# Altium PCB PCB1.PcbDoc
Units mil, origin at the board's own origin, x right, y up, seen from the top; angles counter-clockwise.
Board outline 8640 x 2770 mil, 2 copper layers (Top Layer, Bottom Layer); 77 components, 64 nets, 281 pads, 38 vias.
Unrouted connection lines stored in the file: 4.
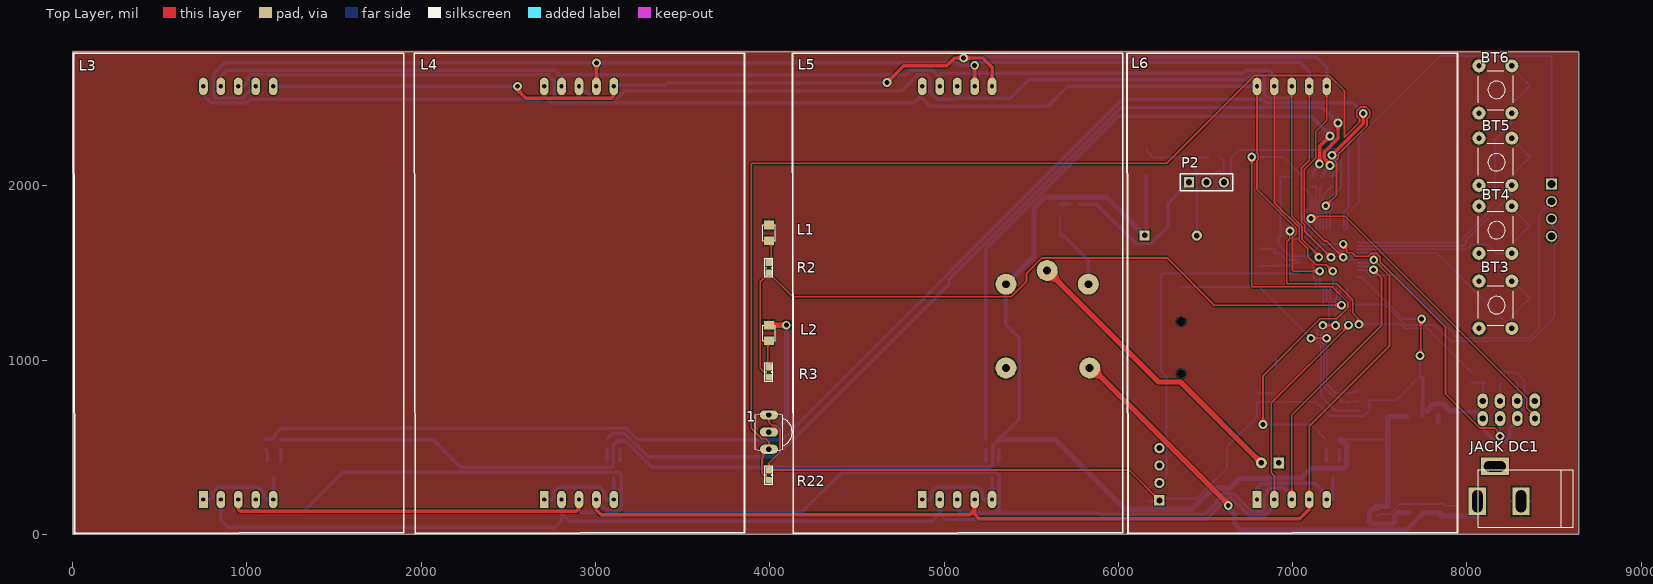
[diagram p0: Top Layer view]
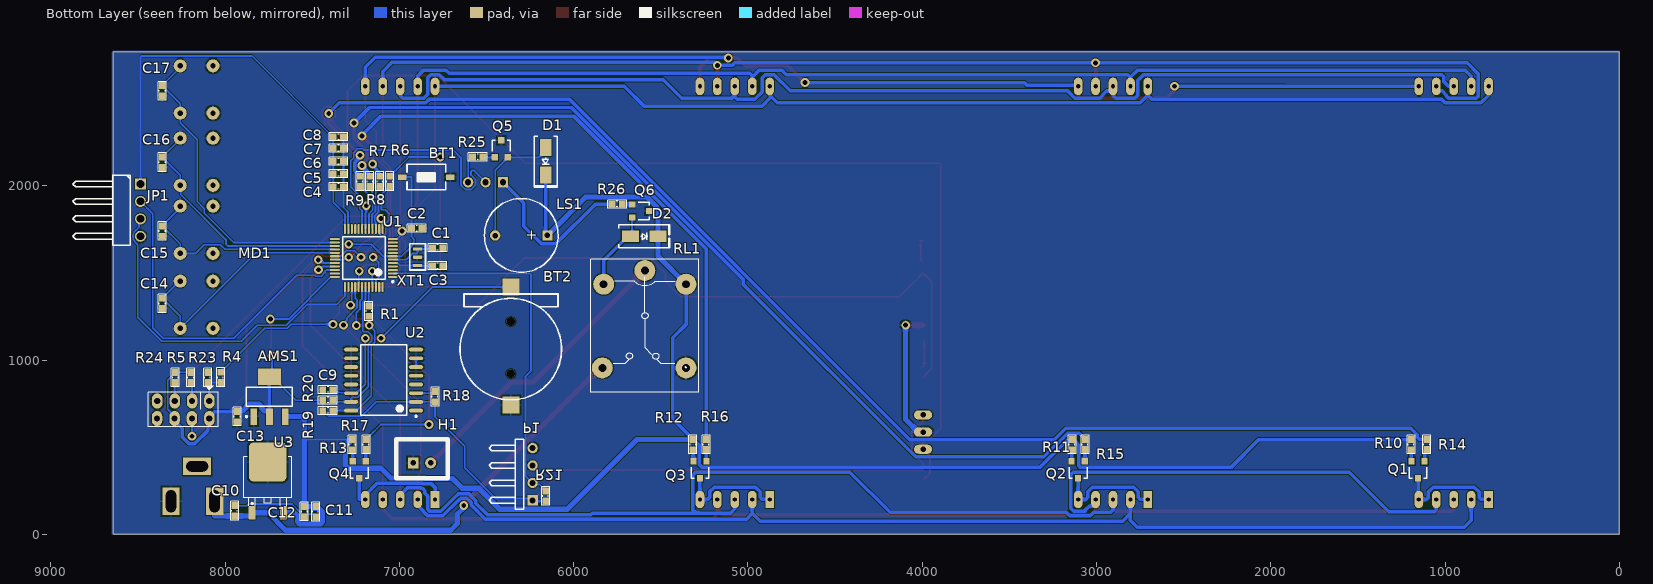
[diagram p1: Bottom Layer view, seen from below]
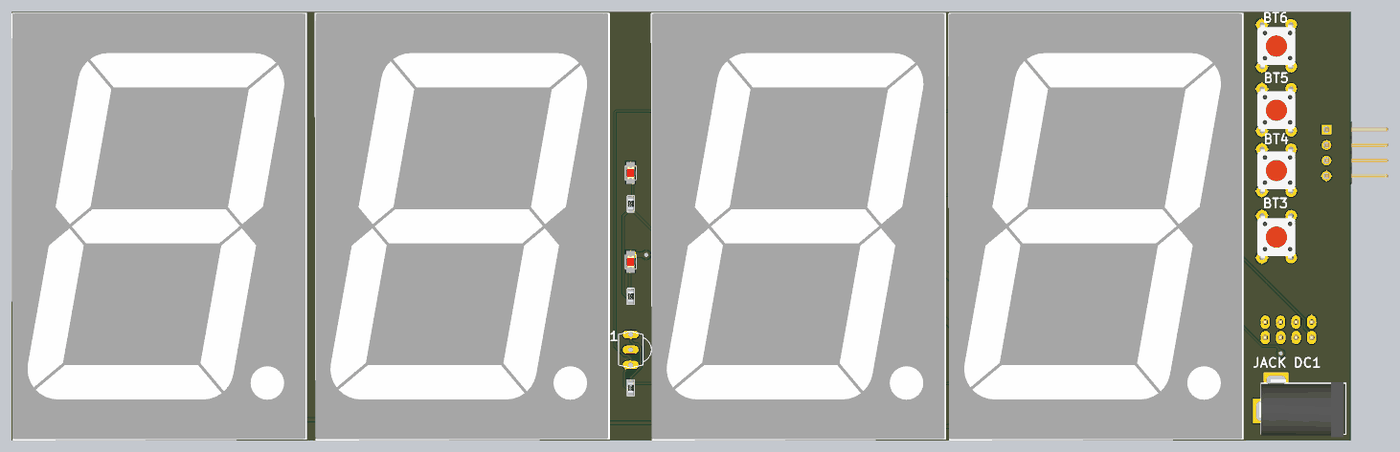
[diagram p2: 3D render of the assembled board from above, using the file's embedded part models]
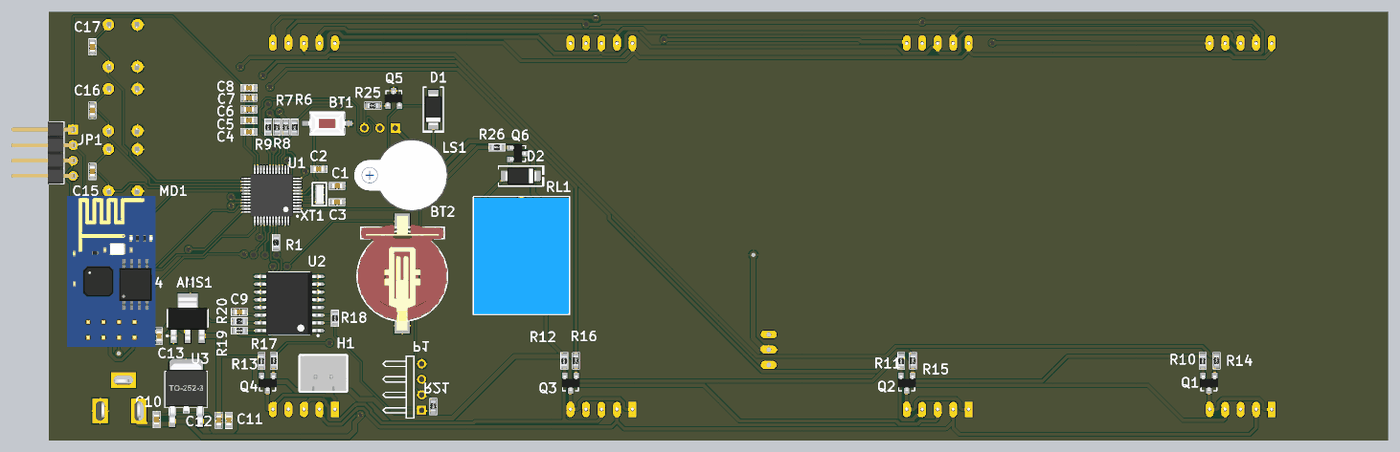
[diagram p3: 3D render of the assembled board from below, using the file's embedded part models]

## Layer stack, top to bottom
Top Solder: solder mask 0.4, Solder Resist, Dk 3.5
Top Layer: signal copper 1.4
Dielectric 1: dielectric 12.6, FR-4, Dk 4.8
Bottom Layer: signal copper 1.4
Bottom Solder: solder mask 0.4, Solder Resist, Dk 3.5

## Board outline
0,0 0,2770 8640,2770 8640,0

## Design rules (kind name [scope] priority, off if disabled: settings)
Clearance [All] p1: gap=6 ignorepadtopadclearanceinfootprint=FALSE
PolygonConnect [All] p1: connectstyle=Relief reliefconductorwidth=10 reliefentries=4 polygonreliefangle="90 Angle" airgapwidth=10
RoutingVias [All] p1: holewidth=28 width=50 viastyle="Through Hole" minholewidth=28 minwidth=50 maxholewidth=28 maxwidth=50
SolderMaskExpansion [All] p1: expansion=4 istentingtop=FALSE
Width [All] p1: maxlimit=30 minlimit=10 preferedwidth=20
30 further rules are at their usual default settings.

## Classes and differential pairs
component class TSOP1838: 1 R22
component class STM32F103xx_LQFP48: BT1 C1 C2 C3 C4 C5 C6 C7 C8 JP1 L1 L2 R1 R2 R3 R4 R5 R6 R7 R8 R9 U1 XT1
component class POWER_12_5_33: AMS1 C10 C11 C12 C13 "JACK DC1" U3
component class ESP8266_Module: MD1 R23 R24
component class DS3231: BT2 C9 R18 R19 R20 U2
component class DHT11: P1 R21
component class BUZZER_RELAY: D1 D2 H1 LS1 P2 Q5 Q6 R25 R26 RL1
component class BUTTONS: BT3 BT4 BT5 BT6 C14 C15 C16 C17
component class 4_LEDS_SEGMENT: L3 L4 L5 L6 Q1 Q2 Q3 Q4 R10 R11 R12 R13 R14 R15 R16 R17

## Components (designator, comment, footprint, x,y, rotation, side; value= is the part's Value field where it differs from the comment)
1 "TSOP1838" TSOP18XX 3993.95,586.62 r90 top
AMS1 "AMS1117-3.3V" SOT223 7745,790 r180 bottom value="AMS1117-3.3V SOT223"
BT1 "Nut Nhan 2 Chan SMD 3x6x2.5" "Nut Nhan 2 Chan SMD 3x6x2.5" 6845,2050 r0 bottom
BT2 "CR1220 SMD" "DE PIN CR1220" 6360,1080 r0 bottom
BT3 "Nut Nhan 4 Chan Cam 6x6" "Nut Nhan 4 Chan Cam 6x6" 8265,1440 r270 top
BT4 "Nut Nhan 4 Chan Cam 6x6" "Nut Nhan 4 Chan Cam 6x6" 8265,1870 r270 top
BT5 "Nut Nhan 4 Chan Cam 6x6" "Nut Nhan 4 Chan Cam 6x6" 8265,2260 r270 top
BT6 "Nut Nhan 4 Chan Cam 6x6" "Nut Nhan 4 Chan Cam 6x6" 8265,2675 r270 top
C1 "22pF" "tu 0603" 6780,1645 r180 bottom
C2 "104" "tu 0603" 6900,1755 r180 bottom
C3 "22pF" "tu 0603" 6780.47,1540 r180 bottom
C4 "104" "tu 0603" 7350,1995 r180 bottom
C5 "104" "tu 0603" 7350,2070 r180 bottom
C6 "104" "tu 0603" 7350,2140 r180 bottom
C7 "104" "tu 0603" 7350,2215 r180 bottom
C8 "104" "tu 0603" 7350,2280 r180 bottom
C9 "104" "tu 0603" 7410,830 r0 bottom
C10 "106" "tu 0603" 7945,135 r90 bottom
C11 "106" "tu 0603" 7480,130 r270 bottom
C12 "106" "tu 0603" 7545,130 r90 bottom
C13 "106" "tu 0603" 7930,675 r90 bottom
C14 "104" "tu 0603" 8360,1325 r270 bottom
C15 "104" "tu 0603" 8360,1740 r270 bottom
C16 "104" "tu 0603" 8360,2135 r270 bottom
C17 "104" "tu 0603" 8360,2545 r270 bottom
D1 "M7" "DIODE SMA" 6160,2140 r270 bottom
D2 "M7" "DIODE SMA" 5595,1710 r180 bottom
H1 "SPEAKER" XH2.54M-2 6920,410 r180 bottom
"JACK DC1" "JACK DC 5.5" "JACK DC 5.5" 8185,290 r180 top value="Jac DC"
JP1 "JP 1x4 2.54" "JP 1x4 DC" 8585,1660 r270 bottom
L1 "LED 0805" LED-0805-Red 3995,1685 r90 top
L2 "LED 0805" LED-0805-Red 3995,1110 r90 top
L3 "LED 7 Thanh" LED7SEG_2.3inch 910,1235 r0 top
L4 "LED 7 Thanh" LED7SEG_2.3inch 2865,1235 r0 top
L5 "LED 7 Thanh" LED7SEG_2.3inch 5035,1235 r0 top
L6 "LED 7 Thanh" LED7SEG_2.3inch 6955,1235 r0 top
LS1 "Coi Chip Speaker" "Coi Chip Speacker" 6150,1715 r0 bottom
MD1 "ESP8266 Module" "ESP2866 Module" 8090,765 r0 bottom
P1 "DHT11" HDR1X4H 6235,195 r90 bottom
P2 "BUZZER & RELAY SWITCHING" HDR1X3 6405,2020 r0 top
Q1 "HF" SOT23 1155,370 r0 bottom value=C9014
Q2 "HF" SOT23 3105,370 r0 bottom value=C9014
Q3 "HF" SOT23 5275,370 r0 bottom value=C9014
Q4 "HF" SOT23 7230,370 r0 bottom value=C9014
Q5 "HF" SOT23 6415,2211.91 r180 bottom value=C9014
Q6 "HF" SOT23 5615,1855 r270 bottom value=C9014
R1 "10k" "tro smd 0603" 7175,1280.47 r270 bottom
R2 "1k" "tro smd 0603" 3995,1529.53 r90 top
R3 "1k" "tro smd 0603" 3995,930.47 r90 top
R4 "1k" "tro smd 0603" 8025,900.47 r90 bottom
R5 "2k" "tro smd 0603" 8100,900 r270 bottom
R6 "1k" "tro smd 0603" 7055,2025 r90 bottom
R7 "1k" "tro smd 0603" 7111.67,2025 r90 bottom
R8 "1k" "tro smd 0603" 7168.33,2025 r90 bottom
R9 "1k" "tro smd 0603" 7225,2025 r90 bottom
R10 "330R" "tro smd 0603" 1195,514.53 r90 bottom
R11 "330R" "tro smd 0603" 3140,514.53 r90 bottom
R12 "330R" "tro smd 0603" 5315,514.53 r90 bottom
R13 "330R" "tro smd 0603" 7270,514.53 r90 bottom
R14 "100R" "tro smd 0603" 1105,515.53 r270 bottom
R15 "100R" "tro smd 0603" 3065,515.53 r270 bottom
R16 "100R" "tro smd 0603" 5240,515.53 r270 bottom
R17 "100R" "tro smd 0603" 7190,515.53 r270 bottom
R18 "10k" "tro smd 0603" 6795,790 r270 bottom
R19 "10k" "tro smd 0603" 7410,710 r0 bottom
R20 "10k" "tro smd 0603" 7410,770 r0 bottom
R21 "4.7k" "tro smd 0603" 6160,220 r270 bottom
R22 "4.7k" "tro smd 0603" 3995,340 r90 top
R23 "10k" "tro smd 0603" 8196.67,900 r270 bottom
R24 "10k" "tro smd 0603" 8285,900 r270 bottom
R25 "100R" "tro smd 0603" 6550,2165 r180 bottom
R26 "100R" "tro smd 0603" 5750,1895 r180 bottom
RL1 "Relay" "Relay 5 Chan SRD" 5591.22,1514.06 r270 bottom
U1 "STM32F103xx_LQFP48" STM32_LQPF48 7203.66,1585.79 r0 bottom
U2 "DS3231" "SOIC 16" 7090,885 r0 bottom
U3 "78M05 SMD TO252" TO252 7755,269.33 r180 bottom
XT1 "20Mhz" "Thach Anh 3 Chan SMD" 6895,1637.24 r270 bottom value=4Mhz

## Footprints (in the part's own frame and the unit in brackets; to place one, negate y for a bottom-side part, rotate by r counter-clockwise, add the part's x,y. Pads: shape width x height; smd on the part's side, far side on the other; paste and mask are expansions set on the pad)
"Coi Chip Speacker" [mm]
  rect 1.5x1.5 hole 0.8: 1(0,0)
  round 1.5 hole 0.8: 2(7.62,0.013)
  silkscreen extent -1.55,-5.38 9.18,5.36, body extent -2.22,-6 13.24,6, height 4.5
"DE PIN CR1220" [mm]
  rect 2.5x2.5 smd: 1(0,-8.6) 2(0,8.6)
  silkscreen extent -7.39,-7.6 7.4,7.84, body extent -7.39,-9.42 7.36,9.38, height 4.27
"DIODE SMA" [mm] "SMA"
  rect 2.5x1.7 smd: 1(-2,0) 2(2,0)
  silkscreen extent -3.68,-1.65 3.75,1.65, body extent -2.6,-1.37 2.6,1.37, height 2.4
"ESP2866 Module" [mil]
  oval 60x86 hole 36: 1(0,0) 2(99,0) 3(198,0) 4(299,0) 5(0,100) 6(100,100) 7(199.5,100) 8(300,100)
  silkscreen extent -51,-86 350,149, body extent -137,-817 433,159, height 381
HDR1X3 [mm] "Connector; Header; 3 Position"
  rect 1.5x1.5 hole 0.9: 1(0,0)
  round 1.5 hole 0.9: 2(2.54,0) 3(5.08,0)
  silkscreen extent -1.27,-1.27 6.35,1.27
HDR1X4H [mm] "Connector; Header; 4 Position; Right Angle"
  rect 1.5x1.5 hole 0.9: 1(0,0)
  round 1.5 hole 0.9: 2(2.54,0) 3(5.08,0) 4(7.62,0)
  silkscreen extent -1.27,1.27 8.89,6.35
"JACK DC 5.5" [mil] "Jac DC input"
  rect 100x160 hole 59.06 slot 125.98 at 90 deg: 1(125,100) 2(-125,100)
  rect 160x100 hole 59.06 slot 125.98 at 0 deg: 3(25,-100)
  silkscreen extent -425,-80 120,250, body extent -410,-105 134,269, height 434
"JP 1x4 DC" [mm] "4 pins, 1 row, right angled, gold plating"
  rect 1.6x1.6 hole 1.1: 1(-8.89,2.54)
  round 1.6 hole 1.1: 2(-6.35,2.54) 3(-3.81,2.54) 4(-1.27,2.54)
  silkscreen extent -10.16,-7.34 0,1.04, body extent -10.16,-7.57 0,2.79, height 2.54
LED7SEG_2.3inch [mil] "Dán"
  rect 50x100 hole 25: 1(-160,-1035)
  oval 50x100 hole 25: 2(-60,-1035) 3(40,-1035) 4(140,-1035) 5(240,-1035) 6(240,1335.08) 7(140,1335.08) 8(40,1335.08) 9(-60,1335.08) 10(-160,1335.08)
  silkscreen extent -905,-1230 990,1525, body extent -905,-1228 985,1528, height 480
LED-0805-Red [mil]
  rect 50x55 smd: 1(0,0) 2(90,0)
  silkscreen extent 0,-35 90,35, body extent 5,-25 85,25, height 43
"Nut Nhan 2 Chan SMD 3x6x2.5" [mm] "Switch SMD type"
  rect 1.2x0.8 smd: 1(-3.5,0) 2(3.5,0)
  silkscreen extent -2.82,-1.85 2.82,1.85, body extent -3.05,-1.85 3.05,1.85, height 2.5
"Nut Nhan 4 Chan Cam 6x6" [mil] "SW button 4pin, 250 x250 mil"
  round 75 hole 31: 1(-13,-8) 1(258,-8) 2(-13,-196) 2(258,-196)
  silkscreen extent 15,-215 240,0, body extent -31,-225 281,19, height 276
"Relay 5 Chan SRD" [mil] "Relay SPDT, 5 pin, 10A,W 650mil, L 800mil, H 800mil"
  round 120 hole 45: 1(0,0) 2(559.06,236.22) 3(559.06,-243.78) 4(78.74,-236.22) 5(78.74,236.22)
  silkscreen extent -63,-311 700,310, body extent -55,-306 697,304, height 602
"SOIC 16" [mm] "SOIC, 16-Leads, Body 10.30x7.50mm, Pitch 1.27mm, IPC Medium Density"
  oval 2.032x0.55 smd: 1(-4.725,4.445) 2(-4.725,3.175) 3(-4.725,1.905) 4(-4.725,0.635) 5(-4.725,-0.635) 6(-4.725,-1.905) 7(-4.725,-3.175) 8(-4.725,-4.445) 9(4.725,-4.445) 10(4.725,-3.175) 11(4.725,-1.905) 12(4.725,-0.635) 13(4.725,0.635) 14(4.725,1.905) 15(4.725,3.175) 16(4.725,4.445)
  silkscreen extent -4.85,-5.15 3.35,5.39, body extent -5.15,-5.17 5.16,5.16, height 2.48
SOT23 [mm] "SOT23"
  rect 0.9x0.95 smd: 1(-0.95,-1.25) 2(0,1.25)
  rect 0.9x0.95 smd mask+0: 3(0.95,-1.25)
  silkscreen extent -1.3,-0.38 1.3,1.25, body extent -1.52,-1.23 1.48,1.27, height 1.06
SOT223 [mm]
  rect 1x2.4 smd: 1(-2.3,-2.9) 2(0,-2.9) 3(2.3,-2.9)
  rect 3.3x2.4 smd: 4(0,2.9)
  silkscreen extent -3.48,-3.02 3.35,1.4, body extent -3.25,-3.56 3.25,3.4, height 1.68
STM32_LQPF48 [mm]
  oval 1.45x0.3 smd: 1(-4.225,2.75) 2(-4.225,2.25) 3(-4.225,1.75) 4(-4.225,1.25) 5(-4.225,0.75) 6(-4.225,0.25) 7(-4.225,-0.25) 8(-4.225,-0.75) 9(-4.225,-1.25) 10(-4.225,-1.75) 11(-4.225,-2.25) 12(-4.225,-2.75) 25(4.225,-2.75) 26(4.225,-2.25) 27(4.225,-1.75) 28(4.225,-1.25) 29(4.225,-0.75) 30(4.225,-0.25) 31(4.225,0.25) 32(4.225,0.75) 33(4.225,1.25) 34(4.225,1.75) 35(4.225,2.25) 36(4.225,2.75)
  oval 0.3x1.45 smd: 13(-2.75,-4.225) 14(-2.25,-4.225) 15(-1.75,-4.225) 16(-1.25,-4.225) 17(-0.75,-4.225) 18(-0.25,-4.225) 19(0.25,-4.225) 20(0.75,-4.225) 21(1.25,-4.225) 22(1.75,-4.225) 23(2.25,-4.225) 24(2.75,-4.225) 37(2.75,4.225) 38(2.25,4.225) 39(1.75,4.225) 40(1.25,4.225) 41(0.75,4.225) 42(0.25,4.225) 43(-0.25,4.225) 44(-0.75,4.225) 45(-1.25,4.225) 46(-1.75,4.225) 47(-2.25,4.225) 48(-2.75,4.225)
  silkscreen extent -4.35,-3.1 3.1,3.57, body extent -4.5,-4.5 4.5,4.5, height 1.6
"Thach Anh 3 Chan SMD" [mm] "SMD Crystal CMR309T package"
  rrect25% 0.45x1.35 smd: 1(0,0) 2(1.2,0) 3(2.4,0)
  silkscreen extent -0.76,-1.14 3.05,1.14, body extent -0.41,-0.63 2.79,0.67, height 1.02
TO252 [mm] "TO252"
  round 0.5 on Mech15: 0(0,0)
  rrect25% 1x2 smd: 1(-2.285,-3.7) 3(2.285,-3.7)
  rrect25% 5.5x5.7 smd: 2(0,3.7)
  silkscreen extent -3.5,-2.7 3.5,4.5, body extent -3.3,-3.95 3.3,5.76, height 2.31
"tro smd 0603" [mm] "Chip Capacitor, 2-Leads, Body 1,60x0,80mm, IPC Medium Density"
  rect 1x0.95 smd mask+0.076: 1(-0.75,0) 2(0.75,0)
  silkscreen extent -1.35,-0.58 1.37,0.58, body extent -0.82,-0.42 0.82,0.43, height 0.44
TSOP18XX [mil]
  oval 52x104 hole 32: GND(-0.05,-1.05) OUT(-98.47,-1.05) VCC(98.38,-1.05)
  silkscreen extent -118,-134 118,78
"tu 0603" [mm] "Chip Capacitor, 2-Leads, Body 1,60x0,80mm, IPC Medium Density"
  rect 1x0.95 smd mask+0.076: 1(-0.75,0) 2(0.75,0)
  silkscreen extent -1.35,-0.58 1.37,0.58, body extent -0.8,-0.4 0.8,0.4, height 0.9
XH2.54M-2 [mm]
  rect 1.6x1.6 hole 0.8: 1(0,0)
  round 1.6 hole 0.8: 2(2.54,0)
  silkscreen extent -2.48,-2.26 5.02,3.46, body extent -2.48,-2.26 5.02,3.48, height 6.91

## Part data
1: "IR Remote Receiver 38KHz 35m 3-Pin", Package=None, Availability=Unavailable, MF=Vishay, MP=TSOP1838, Price=None, SnapEDA_Link=https://www.snapeda.com/parts/TSOP1838/Vishay/view-part/561684/?ref=snap
AMS1: library part "AMS1117 SMD", "Dán", Chung_Loai=Dán, Don_Vi=Con, Ma_Hang=MH000596
BT2: library part "De pin CR1220 SMD", Ma_Hang=MH000833, Ten="Đế PIN CR1220 SMD"
BT3 BT4 BT5 BT6: "Nut Nhan 4 Chan 6x6mm", Ma_Hang=MH004584, Ten="Nút Nhấn 4 Chân 6x6x5MM DIP"
C1 C3: library part "Tu 0603 22pF 50V 10%", "Dán", Chung_Loai=Dán, Don_Vi=Con, Ma_Hang=MH004570, So_Chan=2, Ten_Linh_Kien="Tụ 0603 22pF 50V 10%"
C2 C4 C5 C6 C7 C8 C9 C14 C15 C16 C17: library part "Tu 0603 104 50V 10%", "Dán", Chung_Loai=Dán, Don_Vi=Con, Ma_Hang=MH004568, So_Chan=2, Ten_Linh_Kien="Tụ 0603 104-100nF 10% 50V"
C10 C11 C12 C13: library part "Tu 0603 106 16V 20%", "Dán", Chung_Loai=Dán, Don_Vi=Con, Ma_Hang=MH004848, So_Chan=2, Ten_Linh_Kien="Tụ 0603-10uF 20% 16V"
D1 D2: library part "Diode M7 ( 4007 )", "Dán", Chung_Loai=Dán, Don_Vi=Con, Ma_Hang=MH000944, Ten_Linh_Kien="Diode M7 1N4007 SMD 1A 1000V"
H1: library part "Header 2P 2.54 Duc Thang", "Cắm", Chung_Loai=Cắm, Don_Vi=Con, Ma_Hang=MH001283, Ten_Linh_Kien="Header 2P XH2.54-2P Đực Thẳng"
JP1: library part "JP 1x4 2.54 Duc Cong", "Cắm", Chung_Loai=Cắm, Don_Vi=Con, Ma_Hang=MH000904, Ten_Linh_Kien="Jump Đơn Đực 2.54MM 1x40P Cong Đứng"
L1 L2: library part "LED 0805 Do", "Dán", Chung_Loai=Dán, Don_Vi=Con, Ma_Hang=MH000897, Ten_Linh_Kien="LED 0805 Màu Đỏ (Red)"
L3 L4 L5 L6: library part "LED 7x1 2.3inch Anot", "Dán", Chung_Loai=Dán, Don_Vi=Con, Ma_Hang=MH000901, Ten_Linh_Kien="Led 7 2.3 1 Số Anot (Sáng Đỏ)"
LS1: "Còi chip"
P1: library part "Header 4H", "Header, 4-Pin, Right Angle", LatestRevisionDate=17-Jul-2002, LatestRevisionNote="Re-released for DXP Platform.", Publisher="Altium Limited"
P2: library part "Header 3", "Header, 3-Pin", LatestRevisionDate=17-Jul-2002, LatestRevisionNote="Re-released for DXP Platform.", Publisher="Altium Limited"
Q1 Q2 Q3 Q4 Q5 Q6: library part "C1815 HF SMD", "NPN transistor"
R1 R18 R19 R20 R23 R24: library part "Tro 0603 1% 10k", "Dán", Chung_Loai=Dán, Don_Vi=Con, Ma_Hang=MH006333, So_Chan=2, Ten_Linh_Kien="Trở 0603 1% 10k"
R2 R3 R4 R6 R7 R8 R9: library part "Tro 0603 1% 1k", "Dán", Chung_Loai=Dán, Don_Vi=Con, Ma_Hang=MH006334, So_Chan=2, Ten_Linh_Kien="Trở 0603 1% 1k"
R5: library part "Tro 0603 5% 2k", "Dán", Chung_Loai=Dán, Don_Vi=Con, Ma_Hang=MH006324, So_Chan=2, Ten_Linh_Kien="Trở 0603 5% 2k"
R10 R11 R12 R13: library part "Tro 0603 5% 330R", "Dán", Chung_Loai=Dán, Don_Vi=Con, Ma_Hang=MH006910, So_Chan=2, Ten_Linh_Kien="Trở 0603 5% 330R"
R14 R15 R16 R17 R25 R26: library part "Tro 0603 5% 100R", "Dán", Chung_Loai=Dán, Don_Vi=Con, Ma_Hang=MH006315, So_Chan=2, Ten_Linh_Kien="Trở 0603 5% 100R"
R21 R22: library part "Tro 0603 5% 4.7k", "Dán", Chung_Loai=Dán, Don_Vi=Con, Ma_Hang=MH006327, So_Chan=2, Ten_Linh_Kien="Trở 0603 5% 4.7k"
RL1: library part "Relay 5 Chan SRD", "Relay 5 Chan", Ma_Hang=MH009374, Ten="Relay 5V10A SRD-05VDC-SL-C Chính Hãng"
U2: library part "DS3231 SMD", "SOIC"
U3: "Dán", Chung_Loai=Dán, Don_Vi=Con, Ma_Hang=MH001917, Ten_Linh_Kien="78M05 TO252"
XT1: library part "Thach anh 3 Chan SMD", "Crystal For all Crystal 2pin."
BT1: Ma_Hang=MH001036, Ten="Nút Nhấn 2 Chân 3x6x2.5MM SMD"
U1: ComponentLink1Description="Manufacturer Link", ComponentLink1URL=www.st.com/stm32, ComponentLink2Description=Datasheet, ComponentLink2URL=http://www.st.com/stonline/products/literature/ds/13587.pdf, DatasheetVersion="rev6, Mar-2008", PackageDescription="48-Pin Low-Profile Quad Flat Pack, 7 x 7 mm Body, 0.5 mm Pitch (LQFP48)", PackageReference=LQFP48, PackageVersion=Mar-2008, Published=30-May-2008, Publisher="Altium Limited"

## Via types
v1: diameter 50, hole 28, Top Layer to Bottom Layer, tented both sides, 36 vias
v2: diameter 50, hole 50, Top Layer to Bottom Layer, tented both sides, 2 vias

## Nets (pads, with @x,y where several pads share a name; then routed paths per layer and width w, separated by ;. In a path a pad name is that pad's centre, name@x,y a point inside that pad or via, vN(x,y) a via of type N, cw(c..) or ccw(c..) an arc to the next point about the centre after c; other vN are vias at no path point)
+3.3: 1.VCC AMS1.2 AMS1.4 C4.1 C5.1 C6.1 C7.1 C8.1 C13.2 JP1.1 MD1.5 MD1.7 P1.1 R18.2 R19.2 R20.2 R21.2 R22.2 R23.1 R24.1 U1.9 U1.24 U1.36 U1.48 U2.2 | length 9611.2
  Top Layer w10: 1.VCC 3995,644 4014.43,624.57 4036.74,624.57 4059,602.31 4059,472.41 3995,408.41 R22.2 6060.47,369.53 P1.1 ; v1(7730,1025) 7735,1030 7735,1230 v1(7740,1235)
  Bottom Layer w10: R21.2 6230.47,190.47 6246,206 6449.23,206 6625,381.77 6625,505 6795,675 R18.2 6903.98,760.47 U2.2 7131.48,760 7212.18,679.3 7407.84,679.3 7438.54,710 R19.2 R20.2 7593.11,770 7727.28,904.17 AMS1.4@7736.14,904.17 ; U1.24 7311.93,1836.93 7379.53,1904.53 C4.1 C5.1 C6.1 C7.1 C8.1 7380.51,2280 7845.51,2745 8479.14,2745 8485,2739.14 JP1.1 ; U1.36 7370.59,1476.93 7393.23,1476.93 7635.16,1235 v1(7740,1235) ; v1(7730,1025) 7730,910.32 AMS1.4@7736.14,904.17 ; AMS1.4 AMS1.4@7736.14,904.17 ; R23.1 R24.1 8285,928.54 8329,884.54 8329,717.5 8289.5,678 MD1.7
  Bottom Layer w20: AMS1.2 7745,703.39 AMS1.4 ; C13.2 8058.28,704.53 8090,672.81 MD1.5 8097.65,657.35 8097.65,595.95 8172.6,521 8207.4,521 8244.62,558.22 8244.62,607.12 8289.5,652 MD1.7
  Bottom Layer w30: AMS1.2@7745,703.39 7749.69,708.07 7773.29,708.07 7790.87,725.64 7790.87,733.43 7805.51,748.07 7865.59,748.07 7880.24,733.43 7880.24,726.79 7897.81,709.21 7926.3,709.21 7930,705.51 C13.2
+5: AMS1.3 C11.1 C12.2 D1.2 D2.2 LS1.1 R10.2 R11.2 R12.2 R13.2 RL1.5 U3.3 | length 10891.3
  Bottom Layer w10: R13.2 7545,544.06 7545,545
  Bottom Layer w20: R10.2 2067.76,544.06 2228.3,383.51 3092.36,383.51 3102.31,393.47 3102.31,509.74 3126.94,534.37 R11.2@3131.3,534.37 ; R11.2 3140,543.07 3148.7,534.37 3173.93,534.37 3324.79,383.51 5262.36,383.51 5277.69,398.84 5277.69,510.11 5301.94,534.37 5306.3,534.37 5315,543.07 R12.2 5315,545.04 5432,662.04 5432,1127.18 5355,1204.18 RL1.5 ; LS1.1@6160,1725 D1.2
  Bottom Layer w30: R12.2@5315,543.07 5315.98,544.06 5635.94,544.06 6035.53,144.47 6424.47,144.47 6545,265 6640,265 6695,320 6851.41,320 6854.41,323 7048.94,323 7105.46,379.51 7293.82,379.51 7309.7,395.39 7309.7,513.38 7297.4,525.69 7287.39,525.69 7270,543.07 R13.2 ; RL1.5 5516.26,1596.58 D2.2 5516.26,1865.17 5526.09,1875 5526.09,1881.41 5579.67,1935 5930,1935 LS1.1 LS1.1@6160,1725 ; C11.1 7501.15,159.53 C12.2 7545,544.06 ; 7501.15,158.39 7490.65,147.89 7459.34,147.89 7440.3,128.86 7440.3,72.09 7452.6,59.79 7572.4,59.79 7584.7,72.09 7584.7,106.09 7602.27,123.66 U3.3 ; 7545,545 7545,675.83 AMS1.3
+12: "JACK DC1.1" C10.1 RL1.3 U3.1 | length 2802.6
  Top Layer w30: RL1.3 5847.87,955 6626.17,176.7 6626.17,168.83 v1(6630,165)
  Bottom Layer w30: v1(6630,165) 6624.74,159.74 6624.74,157.19 6667.17,114.77 6667.17,61.57 6704.95,23.79 7652.45,23.79 7752.33,123.66 U3.1 7844.96,105.47 C10.1 8060,105.47 8060,190
BOOT0: R1.1 U1.44 | length 110.3
  Bottom Layer w10: U1.44 7175,1419.45 R1.1
BUZZER: P2.3 R25.1 | length 156.1
  Bottom Layer w10: R25.1 6580.51,2165 6605,2140.51 P2.3
GND: 1.GND "JACK DC1.2" AMS1.1 BT1.1 BT2.2 BT3.2 BT4.2 BT5.2 BT6.2 C1.2 C2.2 C3.2 C4.2 C5.2 C6.2 C7.2 C8.2 C9.2 C10.2 C11.2 C12.1 C13.1 C14.2 C15.2 C16.2 C17.2 H1.1 JP1.4 L1.2 L2.2 MD1.4 P1.4 Q5.2 Q6.2 R1.2 R5.1 RL1.2 U1.8 U1.23 U1.35 U1.47 U2.5 U2.6 U2.7 U2.8 U2.9 U2.10 U2.11 U2.12 U2.13 U3.2 XT1.2 | length 1893.8
  Top Layer w30: L2.2 v1(4095,1200)
  Bottom Layer w10: U2.6 U2.7 ; U1.23 7292.24,1775.25 7294.02,1777.03 7294.02,1849.02 7320,1875 7320,1994.53 C4.2 C5.2 C6.2 C7.2 C8.2 ; C11.2 7480,101.46 7493.7,115.16 7557,115.16 7615.88,174.03 7866.32,174.03 7875.82,164.53 C10.2
  Bottom Layer w30: 1.GND 4021,586.57 4095,660.57 v1(4095,1200) ; AMS1.1@7830.87,643.58 7835.55,648.27 AMS1.1
LED_7_Thanh_A: L3.7 L4.7 L5.7 L6.7 U1.30 | length 8357.3
  Top Layer w10: L6.7 7095,2146.22 7050.09,2101.32 7050.09,1793.7 7069,1774.79 7069,1738.33 7217.33,1590 v1(7220,1590)
  Top Layer w20: L4.7 v1(3005,2705) ; L5.7 v1(5175,2691)
  Bottom Layer w10: v1(7220,1590) 7257,1627 7305.33,1627 7336.35,1595.98 7369.65,1595.98 U1.30
  Bottom Layer w20: L3.7 1050,2545 1017,2545 992,2520 992,2515.08 980,2503.08 820,2503.08 808,2515.08 808,2640 873,2705 v1(3005,2705) 5074.5,2705 5088.5,2691 v1(5175,2691) 5194,2710 7040,2710 7095,2655 L6.7
LED_7_Thanh_B: L3.6 L4.6 L5.6 L6.6 U1.31 | length 7860.2
  Top Layer w10: L6.6 7195,2374.39 7132,2311.39 7132,2159.18 7066.09,2093.27 7066.09,1800.33 7183.93,1682.49 7195.18,1682.49 7287.67,1590 v1(7290,1590)
  Top Layer w20: v1(2552,2571) 2552,2551 2600,2503 3090,2503 3105,2518 L4.6 ; v1(4672,2592) 4768,2688 5015,2688 5060,2733 v1(5112,2733) 5222,2733 5275,2680 L5.6
  Bottom Layer w10: v1(7290,1590) 7300.82,1590 7314.88,1575.94 U1.31
  Bottom Layer w20: L3.6 1150,2570 1915,2570 1916,2571 v1(2552,2571) ; L4.6 3105,2578 3399,2578 3413,2592 v1(4672,2592) ; v1@5116,2737 7138,2737 7195,2680 L6.6
LED_7_Thanh_C: L3.4 L4.4 L5.4 L6.4 U1.32 | length 8708.4
  Top Layer w10: L6.4 7095,619.24 7555,1079.24 7555,1485 v1(7465,1575)
  Top Layer w20: L4.4 3005,140 3032,113 5148,113 5175,140 ; L5.4 5175,140 ; L6.4 7095,145 7040,90 5200,90 5175,115 5175,140
  Bottom Layer w10: U1.32 7435.44,1556.26 7454.18,1575 v1(7465,1575)
  Bottom Layer w20: L3.4 1050,140 1060,130 1323,130 1549.51,356.51 3133.49,356.51 3147,343 3147,150 3130,133 3063,133 3063,140 3042,161 3005,161 L4.4
LED_7_Thanh_D: L3.3 L4.3 L5.3 L6.3 U1.33 | length 8788.8
  Top Layer w10: L6.3 6995,685 7510,1200 7510,1468.28 7463.84,1514.45 v1(7463.84,1518.01)
  Top Layer w20: L3.3 950,143 960,133 2890,133 2905,148 L4.3
  Bottom Layer w10: U1.33 7442.6,1536.57 7455.34,1523.84 7463.84,1523.84 v1(7463.84,1518.01)
  Bottom Layer w20: L4.3 2905,140 2919,126 3016,126 3036,106 3154,106 3174,126 4184,126 4414.51,356.51 5300.49,356.51 5317,340 5317,139 5300,122 ; L5.3 5075,147 5100,122 5300,122 ; L6.3 6995,225 6954,266 6878.02,266 6875.02,263 6866,263 6853,250 6853,235.72 6837,219.72 6837,142.96 6827.04,133 6761.8,133 6670.8,224 6668.58,224 6658.58,234 6601.42,234 6561,193.58 6561,179.44 6495.03,113.47 5901.78,113.47 5893.25,122 5300,122
LED_7_Thanh_E: L3.2 L4.2 L5.2 L6.2 U1.40 | length 8056.1
  Top Layer w10: L6.2 6895,335.72 6876.5,354.22 6876.5,754.18 7320,1197.67 v1(7320,1200)
  Bottom Layer w10: U1.40 7252.87,1355.2 7243,1345.33 7243,1299.67 7299.52,1243.16 7299.52,1231.31 7320,1210.82 v1(7320,1200)
  Bottom Layer w20: L3.2 850,80 890,40 2765,40 2805,80 2805,120 ; L4.2 2805,120 ; L5.2 4975,120 ; L6.2 6895,166.88 6864,135.88 6864,131.77 6838.23,106 6750.62,106 6659.62,197 6657.4,197 6647.4,207 6612.6,207 6588,182.4 6588,168.25 6507.22,87.47 5007.53,87.47 4975,120 ; 2805,120 2850,75 4930,75 4975,120
LED_7_Thanh_F: L3.9 L4.9 L5.9 L6.9 U1.41 | length 7695.6
  Top Layer w10: L6.9 6895,1903.54 7037,1761.54 7037,1688 7086.8,1638.2 7086.8,1593.54 7133.35,1547 7193,1547 v1(7230,1510)
  Bottom Layer w10: v1(7230,1510) 7232.84,1507.16 7232.84,1419.79 U1.41
  Bottom Layer w20: L3.9 850,2628 886.08,2664.08 2763.92,2664.08 2805,2623 ; L4.9 2805,2623 ; L5.9 4975,2623 ; L6.9 6895,2630 6860.92,2664.08 6733.37,2664.08 6714.29,2645 4990,2645 4975,2630 4975,2623 ; 2805,2623 2820,2638 4780.61,2638 4806.69,2664.08 4933.92,2664.08 4975,2623
LED_7_Thanh_G: L3.10 L4.10 L5.10 L6.10 U1.45 | length 7762
  Top Layer w10: L6.10 6795,2187.33 6802,2180.33 6802,2149.67 6795,2142.67 6795,1980.91 7021,1754.91 7021,1725.09 6998.82,1702.9 6998.82,1515.86 7004.67,1510 v1(7155,1510)
  Bottom Layer w10: U1.45 7154.72,1419.72 7154.72,1509.72 v1(7155,1510)
  Bottom Layer w20: L3.10 750,2520 793.92,2476.08 1000.08,2476.08 1019,2495 2680,2495 2705,2520 ; L4.10 2705,2520 ; L5.10 4875,2520 4865,2510 ; L6.10 6795,2571 5709,2571 5593,2455 4920,2455 4865,2510 ; 2705,2520 2748.92,2476.08 4831.08,2476.08 4865,2510
LED_7_Thanh_H: L3.8 L4.8 L5.8 L6.8 U1.46 | length 7963.3
  Top Layer w10: L6.8 6995,1826.17 7053,1768.17 7053,1694.63 7150,1597.63 v1(7150,1590)
  Bottom Layer w10: U1.46 7134.42,1419.79 7134.42,1456.59 7118,1473.01 7118,1558 v1(7150,1590)
  Bottom Layer w20: L3.8 950,2570 980,2570 1008,2598 1008,2625.08 1020,2637.08 2730,2637.08 2763,2604.08 2763,2520 2779.92,2503.08 2890,2503.08 2905,2518.08 L4.8@2905,2545 ; L4.8 L4.8@2905,2545 ; L5.8 5075,2518 ; L6.8 6995,2518 6980,2503 6860,2503 6837,2526 6837,2620.08 6820,2637.08 6770.08,2637.08 6741,2608 5485,2608 5380,2503 5090,2503 5075,2518 ; L4.8@2905,2545 2940,2545 2963,2522 2963,2520 2979.92,2503.08 3124.08,2503.08 3166,2545 4757.92,2545 4850,2637.08 4900,2637.08 4918,2619.08 4918,2538 4960,2496 5061,2496 5075,2510 5075,2518
MIDDLE_LED: R2.1 R3.1 U1.39 | length 4320.8
  Top Layer w10: R3.1 3995,901.93 3945,951.93 3945,1449.02 R2.1@3995,1499.02 ; R2.1 R2.1@3995,1499.02 ; v1(7280,1315) 6550.81,1315 6279.76,1586.06 5561.4,1586.06 5473.11,1497.77 5473.11,1451.6 5384.82,1363.32 4130.7,1363.32 R2.1@3995,1499.02
  Bottom Layer w10: U1.39 7272.56,1322.44 v1(7280,1315)
Net1_OUT: 1.OUT R22.1 U1.18 | length 6903.1
  Top Layer w10: R22.1 3995,311.46 3955,351.46 3955,440 3962.15,447.15 3962.15,468.75 3981.55,488.15 1.OUT 3995,529.15 3975.58,548.57 3953.26,548.57 3894.04,607.79 3894.04,2123.18 3899.9,2129.04 6276.64,2129.04 6779.67,2632.08 7210.33,2632.08 7297,2545.41 7297,2278.11 7383,2364.11 7383,2384.67 7368,2399.67 7368,2430.33 7389.67,2452 7420.33,2452 7442,2430.33 7442,2399.67 7427,2384.67 7427,2345.89 7262,2180.89 7262,2159.67 7242.57,2140.24 7251.46,2131.35 7251.46,1946.46 v1(7190,1885)
  Bottom Layer w10: v1(7190,1885) 7190,1848.27 7193.82,1844.45 U1.18
NetBT2_1: BT2.1 C9.1 U2.14 | length 1432.4
  Top Layer w10: v1(7104,1125) v1(7195,1125)
  Bottom Layer w10: BT2.1 6810.42,1418.58 v1(7104,1125) ; v1(7195,1125) 7195,861.85 7246.85,810 U2.14 7305.2,810 7365.79,816.3 C9.1
NetBT3_1: BT3.1 C14.1 U1.29 | length 1426
  Bottom Layer w10: U1.29 7823.69,1615.31 8257,1182 8257,1250.54 8360,1353.54 C14.1 8360,1355.51 8262.51,1453 BT3.1@8257,1453
NetBT4_1: BT4.1 C15.1 U1.28 | length 1274.8
  Bottom Layer w10: U1.28 8000,1635 8026.5,1661.5 8119.2,1661.5 8168.7,1612 8257,1612 8257,1665.54 8360,1768.54 C15.1 8360,1770.51 8257,1873.51 BT4.1@8257,1883
NetBT5_1: BT5.1 C16.1 U1.27 | length 1430.6
  Bottom Layer w10: U1.27 7983.83,1654.69 7995,1665.86 7995,1691.21 8253.29,1949.5 8253.29,1998.29 8257,2002 8257,2060.54 8360,2163.54 C16.1 8360,2165.51 8257,2268.51 BT5.1@8257,2273
NetBT6_1: BT6.1 C17.1 U1.26 | length 1805.8
  Bottom Layer w10: U1.26 7949.37,1674.37 8118.5,1843.5 8118.5,1868.5 8160,1910 8160,2265 8257,2362 8257,2417 8257,2470.54 8360,2573.54 C17.1 8360,2575.51 8257,2678.51 BT6.1@8257,2688
NetD1_1: D1.1 LS1.2 Q5.3 | length 728.2
  Bottom Layer w10: D1.1 6160,2202.99 6200.29,2162.7 Q5.3 6377.6,2161.72 6450,2089.31 LS1.2
NetD2_1: D2.1 Q6.3 RL1.4 | length 459.1
  Bottom Layer w10: Q6.3 5664.21,1719.53 D2.1
  Bottom Layer w20: D2.1 5689.49,1710 5827.44,1572.05 RL1.4
NetH1_2: H1.2 RL1.1 | length 1686.1
  Top Layer w30: RL1.1 6230.78,874.5 6355.5,874.5 H1.2
NetL1_1: L1.1 R2.2 | length 150
  Top Layer w10: R2.2 4008.7,1572.76 4008.7,1681.7 4012,1685 L1.1
NetL2_1: L2.1 R3.2 | length 155.8
  Top Layer w10: R3.2 3987.96,967.04 3987.96,1102.96 L2.1
NetL3_1: L3.1 L3.5 Q1.2 | length 618.3
  Bottom Layer w20: L3.1 793.28,200 805,211.72 805,243.64 831.36,270 1068.64,270 1095,243.64 1095,211.72 1106.72,200 L3.5 1152.5,202.5 1152.5,318.29 Q1.2
NetL4_1: L4.1 L4.5 Q2.2 | length 616.2
  Bottom Layer w20: L4.1 2748.28,200 2760,211.72 2760,243.64 2786.36,270 3023.64,270 3050,243.64 3050,211.72 3061.72,200 L4.5 Q2.2
NetL5_1: L5.1 L5.5 Q3.2 | length 616.2
  Bottom Layer w20: L5.1 4918.28,200 4930,211.72 4930,243.64 4956.36,270 5193.64,270 5220,243.64 5220,211.72 5231.72,200 L5.5 Q3.2
NetL6_1: L6.1 L6.5 Q4.2 | length 687.1
  Bottom Layer w20: L6.1 6795,269 6815,289 6864.25,289 6867.25,292 7128,292 7195,225 L6.5 7230,200 Q4.2
NetMD1_1: MD1.1 R4.1 R5.2 | length 184.8
  Bottom Layer w10: R4.1 8099.53,870.94 R5.2 8090,860.47 MD1.1
NetMD1_2: MD1.2 R23.2 | length 108.6
  Bottom Layer w10: MD1.2 8189,862.8 R23.2
NetMD1_3: MD1.3 R24.2 | length 106.7
  Bottom Layer w10: R24.2 8288,867.47 MD1.3
NetMD1_8: MD1.8 U1.13 | length 1876.3
  Top Layer w10: v1(7104.85,1812.48) 7112.37,1820 7144.85,1820 7149.85,1825 7300.4,1825 8342.91,782.48 8342.91,725.09 8390,678 MD1.8
  Bottom Layer w10: U1.13 7095.74,1752.47 7095.74,1792.55 7104.85,1801.66 v1(7104.85,1812.48)
NetP1_2: P1.2 R21.1 U1.2 | length 2115.8
  Bottom Layer w10: R21.1 6160,250.51 6195.1,285.61 6225.61,285.61 P1.2 6276.53,336.53 6276.53,904.81 6245,936.34 6245,1491.35 6250.86,1497.2 U1.2
NetP2_2: P2.2 U1.19 | length 1594.7
  Bottom Layer w10: P2.2 6573.86,2088.86 6582.14,2088.86 6588,2083 6588,2061.73 6563.47,2037.2 6563.47,2002.8 6587.8,1978.47 6622.2,1978.47 6646.53,2002.8 6646.53,2161.53 6690,2205 7202.67,2205 7209.67,2212 7240.33,2212 7262,2190.33 7262,2159 7278.46,2142.54 7278.46,1993.58 7255,1970.12 7255,1970 7213.5,1928.5 7213.5,1913.82 7227,1900.33 7227,1869.67 7213.5,1856.18 U1.19
NetQ1_1: Q1.1 R14.2 | length 72
  Bottom Layer w20: R14.2 1105,485.02 1117.6,472.42 Q1.1
NetQ1_3: Q1.3 R10.1 | length 66.9
  Bottom Layer w20: Q1.3 1193.7,420.51 1193.7,483.7 R10.1
NetQ2_1: Q2.1 R15.2 | length 67.9
  Bottom Layer w20: R15.2 3066.3,484.7 3066.3,420.51 Q2.1
NetQ2_3: Q2.3 R11.1 | length 66.8
  Bottom Layer w20: R11.1 3141.2,483.8 3141.2,420.41 Q2.3
NetQ3_1: Q3.1 R16.2 | length 67.8
  Bottom Layer w20: Q3.1 5238.8,420.41 5238.8,484.8 R16.2
NetQ3_3: Q3.3 R12.1 | length 66.9
  Bottom Layer w20: Q3.3 5313.7,420.51 5313.7,483.7 R12.1
NetQ4_1: Q4.1 R17.2 | length 69.4
  Bottom Layer w20: R17.2 7192.6,486 Q4.1
NetQ4_3: Q4.3 R13.1 | length 68.4
  Bottom Layer w20: Q4.3 7267.4,485 R13.1
NetQ5_1: Q5.1 R25.2 | length 69
  Bottom Layer w10: Q5.1 6518.17,2162.7 R25.2
NetQ6_1: Q6.1 R26.2 | length 57.3
  Bottom Layer w20: Q6.1 5665.51,1893.7 5719.17,1893.7 R26.2
NetR4_2: R4.2 U1.12 | length 1719.1
  Top Layer w10: v1(6985,1740) 6982.82,1737.82 6982.82,1695.38 6965.86,1678.42 6965.86,1443.79 6971.72,1437.93 7252.07,1437.93 7345,1345 7345,1270 7376.72,1238.28 7376.72,1208.28 v1(7380,1205)
  Bottom Layer w10: v1(6985,1740) 6992.65,1732.35 6992.65,1716.09 7014.68,1694.06 U1.12 ; v1(7380,1205) 7619.9,1205 7641.9,1183 7772.98,1183 8025,930.98 R4.2
NetR6_1: R6.1 U1.14 | length 423.2
  Bottom Layer w10: R6.1 7055,1994.49 7068.7,1980.79 7075.11,1980.79 7080.97,1974.93 7080.97,1970.82 7115.08,1936.7 7115.08,1934.53 7102,1921.45 7102,1862 7079.67,1862 7058,1840.33 7058,1803.49 7077.49,1784 7077.49,1722.07 7087.98,1711.58 7102.81,1711.58 7113.3,1722.07 7113.3,1752.13 U1.14
NetR6_2: R6.2 R17.1 | length 3020.9
  Top Layer w10: v1(6765,2165) 6765,1426.79 6770.86,1420.93 7226.4,1420.93 7317,1330.33 7317,1299.67 7253.58,1236.26 7157.01,1236.26 6830,909.25 v1(6830,630)
  Bottom Layer w10: v1(6765,2165) 6944.53,2165 7040.31,2069.21 7041.3,2069.21 7055,2055.51 R6.2 ; v1(6830,630) 7105.06,630 7175.31,559.74 7176.3,559.74 7190,546.04 R17.1
NetR7_1: R7.1 U1.15 | length 283.7
  Bottom Layer w10: R7.1 7134.76,1995.47 7134.76,1930.17 7120,1915.41 7120,1848.24 7140.85,1827.39 7140.85,1797.57 7134.76,1791.48 U1.15
NetR7_2: R7.2 R16.1 | length 3706.9
  Top Layer w20: v1(7153.19,2125.19) 7154,2126 7154,2225.62 v1(7213.58,2285.2)
  Bottom Layer w20: R16.1 5240,1639.17 6000.83,2400 7105,2400 7213.58,2291.42 v1(7213.58,2285.2) ; R7.2 7120.37,2063.23 7120.37,2084.25 7153.19,2117.07 v1(7153.19,2125.19)
NetR8_1: R8.1 U1.16 | length 266.6
  Bottom Layer w10: U1.16 7154.79,1752.47 7154.79,1786.06 7157.09,1788.36 7157.09,1833.78 7136,1854.87 7136,1907.37 7154.63,1926 7154.63,1981.77 R8.1
NetR8_2: R8.2 R15.1 | length 5521.1
  Top Layer w20: v1(7214.46,2116.03) 7214.46,2123.31 7181,2156.77 7181,2193.23 7260,2272.23 v1(7260,2360)
  Bottom Layer w20: R15.1 3065,546.04 3099.7,580.74 3165.74,580.74 3301.33,445.15 4037.4,445.15 5025.23,1432.98 5025.23,1461.17 6013.06,2449 7171,2449 v1(7260,2360) ; R8.2 7177.03,2063.23 7177.03,2075.67 7214.46,2113.1 v1(7214.46,2116.03)
NetR9_1: R9.1 U1.17 | length 285.7
  Bottom Layer w10: U1.17 7174.13,1840.09 7153,1861.23 7153,1900.33 7174.13,1921.46 7174.13,1945.92 7199.03,1970.82 7199.03,1974.93 7204.89,1980.79 7211.3,1980.79 7225,1994.49 R9.1
NetR9_2: R9.2 R14.1 | length 7663.3
  Top Layer w20: v1(7225,2175) 7405,2355 v1(7405,2415)
  Bottom Layer w20: R14.1 1147.58,545.06 1159.3,556.77 1159.3,570.78 1196.26,607.74 3176.93,607.74 3241.09,543.57 4070.87,543.57 6022.29,2495 6829.82,2495 6848.82,2476 7344,2476 v1(7405,2415) ; R9.2 7225,2055.51 7256.46,2086.97 7256.46,2133.42 7230.74,2159.15 7230.74,2169.26 v1(7225,2175)
NetR18_1: R18.1 U2.3 | length 118.5
  Bottom Layer w10: R18.1 6795,810 U2.3
NetR19_1: R19.1 U1.42 U2.16 | length 988.3
  Top Layer w10: v1(7172.34,1199.26) 7172.64,1198.96 7246.04,1198.96 v1(7246.34,1198.66)
  Bottom Layer w10: v1(7172.34,1199.26) 7141,1167.92 7141,1102.63 7161,1082.63 7161,795.85 7246.85,710 U2.16 R19.1 ; U1.42 7213.5,1350.89 7226,1338.4 7226,1292.63 7246.34,1272.3 v1(7246.34,1198.66)
NetR20_1: R20.1 U1.43 U2.15 | length 877.6
  Bottom Layer w10: U1.43 7193.82,1346.54 7209,1331.36 7209,1249.94 7209.34,1249.61 7209.34,1168.19 7203.14,1162 7179.67,1162 7158,1140.33 7158,1109.67 7178,1089.67 7178,846.57 7237.4,787.17 7270.17,787.17 7276.02,781.32 U2.15 7370.47,760 R20.1
OSC_IN: C3.1 U1.5 XT1.3 | length 235.7
  Bottom Layer w10: C3.1 6895,1540 XT1.3 6995.54,1542.76 7007.27,1554.48 7012.41,1554.48 7014.19,1556.26 U1.5
OSC_OUT: C1.1 U1.6 XT1.1 | length 273
  Bottom Layer w10: C1.1 6809.53,1637.24 XT1.1 6895,1616.72 6900.86,1610.86 6925.25,1610.86 6960.16,1575.94 U1.6
RELAY: P2.1 R26.1 | length 942.9
  Bottom Layer w20: R26.1 5874.63,1895 6101.15,1668.47 6186.57,1668.47 6286.02,1767.92 6286.02,1901.02 P2.1
RESET: BT1.2 C2.1 MD1.6 U1.7 | length 2611.7
  Top Layer w10: v1(7290,1665) 7290,1654.18 7310.48,1633.69 7310.48,1621.84 7317.33,1615 7341.75,1615 7361.75,1595 7432.67,1595 7449.67,1612 7480.33,1612 7502,1590.33 7502,1562.04 7876.46,1187.58 7876.46,806.14 8072.6,610 8160,610 8173.75,596.25 8173.75,590.07 8190,573.82 v1(8190,563)
  Bottom Layer w10: BT1.2 6929.53,2050 C2.1 6929.53,1706.85 6913.63,1690.96 6913.63,1682.67 6920.43,1675.87 6920.43,1662.92 6929.53,1653.82 6987.72,1595.63 U1.7 7091.71,1595.63 7161.08,1665 v1(7290,1665) ; v1(8190,563) MD1.6
SWCLK: JP1.3 U1.37 | length 1995.4
  Bottom Layer w10: U1.37 7311.93,1365.86 7358.79,1319 7528.53,1319 7648.53,1199 7816,1199 7907,1108 8362.04,1108 8500,1245.96 8500,1660.1 8504.63,1666.39 ccw(c8478.96,1707) 8524.47,1691.62 cw(c8533.92,1688.36) 8524.75,1692.35 ccw(c8485,1710) 8521,1734.41 cw(c8529.32,1739.95) 8520.4,1735.44 8520.36,1735.48 ; JP1.3 8493.01,1801.99 8493.01,1763.58 8493.15,1763.43 8520.32,1735.53
SWDIO: JP1.2 U1.34 | length 1994.4
  Bottom Layer w10: U1.34 7418.46,1516.89 7426.84,1508.51 7426.84,1502.69 7448.51,1481.01 7479.16,1481.01 7484.99,1486.84 7588.16,1486.84 7950,1125 8355,1125 8414.93,1184.93 8414.93,1839.93 JP1.2
pads on no net: "JACK DC1.3" P1.3 U1.1 U1.3 U1.4 U1.10 U1.11 U1.20 U1.21 U1.22 U1.25 U1.38 U2.1 U2.4 U3.0
copper on no net:
  other v2: 6360,921.5 6360.2,1220.9

## Polygon pours and split planes (outlines as drawn)
GND on Top Layer "GND_L01_P000" (solid, pour order 0): 8640,0 8635,5 8635,2775 0,2775 0,0
GND on Bottom Layer "GND_L02_P001" (solid, pour order 1): 8650,0 8650,2765 8640,2775 0,2775 0,0

## Text inside footprints (layer, text, board x,y; h text height)
LS1: Bottom Overlay "+" at 6205.5,1743 h60 r180